# EAGLE board 16-Step Dual Sequencer (EAGLE 6.5.0)
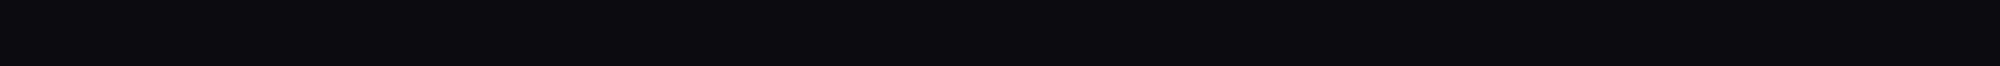
[diagram p0: board, top side]
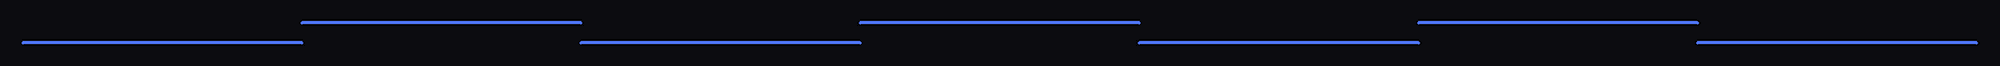
[diagram p1: board, bottom side, seen from below]

No outline drawn. Coordinates in mm, seen from the top.
Copper layers (1*16): Top 0.035mm / dielectric 1.5mm / Bottom 0.035mm
Design rules "default": minimum track width 10mil, minimum drill 24mil, track to track 8mil, track to pad 8mil, pad to pad 8mil, via to via 8mil, smd to smd 8mil, copper to edge 40mil, drill to drill 8mil, minimum pad ring 10mil, minimum via ring 8mil, stop-mask expansion 4mil, vias tented up to drill 0mil, thermal gap 10mil

## Placement (x,y rotation side)
E$1  [4U_12]  0,0 0 top
E$2  [POTENTIOMETER_TAYDA_6MM]  36.83,22.86 180 top
E$3  [POTENTIOMETER_TAYDA_6MM]  36.83,55.88 180 top
E$4  [POTENTIOMETER_TAYDA_6MM]  72.39,22.86 180 top
E$5  [POTENTIOMETER_TAYDA_6MM]  107.95,22.86 180 top
E$6  [POTENTIOMETER_TAYDA_6MM]  143.51,22.86 180 top
E$7  [POTENTIOMETER_TAYDA_6MM]  72.39,55.88 180 top
E$8  [POTENTIOMETER_TAYDA_6MM]  285.75,154.94 0 top
E$9  [POTENTIOMETER_TAYDA_6MM]  285.75,121.92 0 top
E$10  [POTENTIOMETER_TAYDA_6MM]  107.95,55.88 180 top
E$11  [POTENTIOMETER_TAYDA_6MM]  143.51,55.88 180 top
E$12  [POTENTIOMETER_TAYDA_6MM]  179.07,22.86 180 top
E$13  [POTENTIOMETER_TAYDA_6MM]  250.19,154.94 0 top
E$14  [POTENTIOMETER_TAYDA_6MM]  214.63,154.94 0 top
E$15  [POTENTIOMETER_TAYDA_6MM]  179.07,154.94 0 top
E$16  [POTENTIOMETER_TAYDA_6MM]  250.19,121.92 0 top
E$17  [POTENTIOMETER_TAYDA_6MM]  214.63,121.92 0 top
E$18  [POTENTIOMETER_TAYDA_6MM]  179.07,121.92 0 top
E$19  [POTENTIOMETER_TAYDA_6MM]  179.07,55.88 180 top
E$20  [POTENTIOMETER_TAYDA_6MM]  214.63,22.86 180 top
E$21  [POTENTIOMETER_TAYDA_6MM]  250.19,22.86 180 top
E$22  [POTENTIOMETER_TAYDA_6MM]  285.75,22.86 180 top
E$23  [POTENTIOMETER_TAYDA_6MM]  143.51,154.94 0 top
E$24  [POTENTIOMETER_TAYDA_6MM]  143.51,121.92 0 top
E$25  [POTENTIOMETER_TAYDA_6MM]  214.63,55.88 180 top
E$26  [POTENTIOMETER_TAYDA_6MM]  250.19,55.88 180 top
E$27  [POTENTIOMETER_TAYDA_6MM]  285.75,55.88 180 top
E$28  [POTENTIOMETER_TAYDA_6MM]  107.95,154.94 0 top
E$29  [POTENTIOMETER_TAYDA_6MM]  72.39,154.94 0 top
E$30  [POTENTIOMETER_TAYDA_6MM]  36.83,154.94 0 top
E$31  [POTENTIOMETER_TAYDA_6MM]  107.95,121.92 0 top
E$32  [POTENTIOMETER_TAYDA_6MM]  72.39,121.92 0 top
E$33  [POTENTIOMETER_TAYDA_6MM]  36.83,121.92 0 top

## Library data of the parts
E$1-E$33 = !synth_panel

## Tracks (layer width: path | path; a pad name or v marks a point on that pad's centre or on a via)
S$1
  Bottom 0.406: 7.62,195.58 43.18,195.58 | 43.18,198.12 78.74,198.12 | 78.74,195.58 114.3,195.58 | 114.3,198.12 149.86,198.12 | 149.86,195.58 185.42,195.58 | 185.42,198.12 220.98,198.12 | 220.98,195.58 256.54,195.58